# Altium PCB 简易数字示波器PCB.pcbdoc
Units mil, origin at the board's own origin, x right, y up, seen from the top; angles counter-clockwise.
Board outline 3525 x 4588.21 mil, 2 copper layers (Top Layer, Bottom Layer); 58 components, 40 nets, 190 pads, 1 vias.
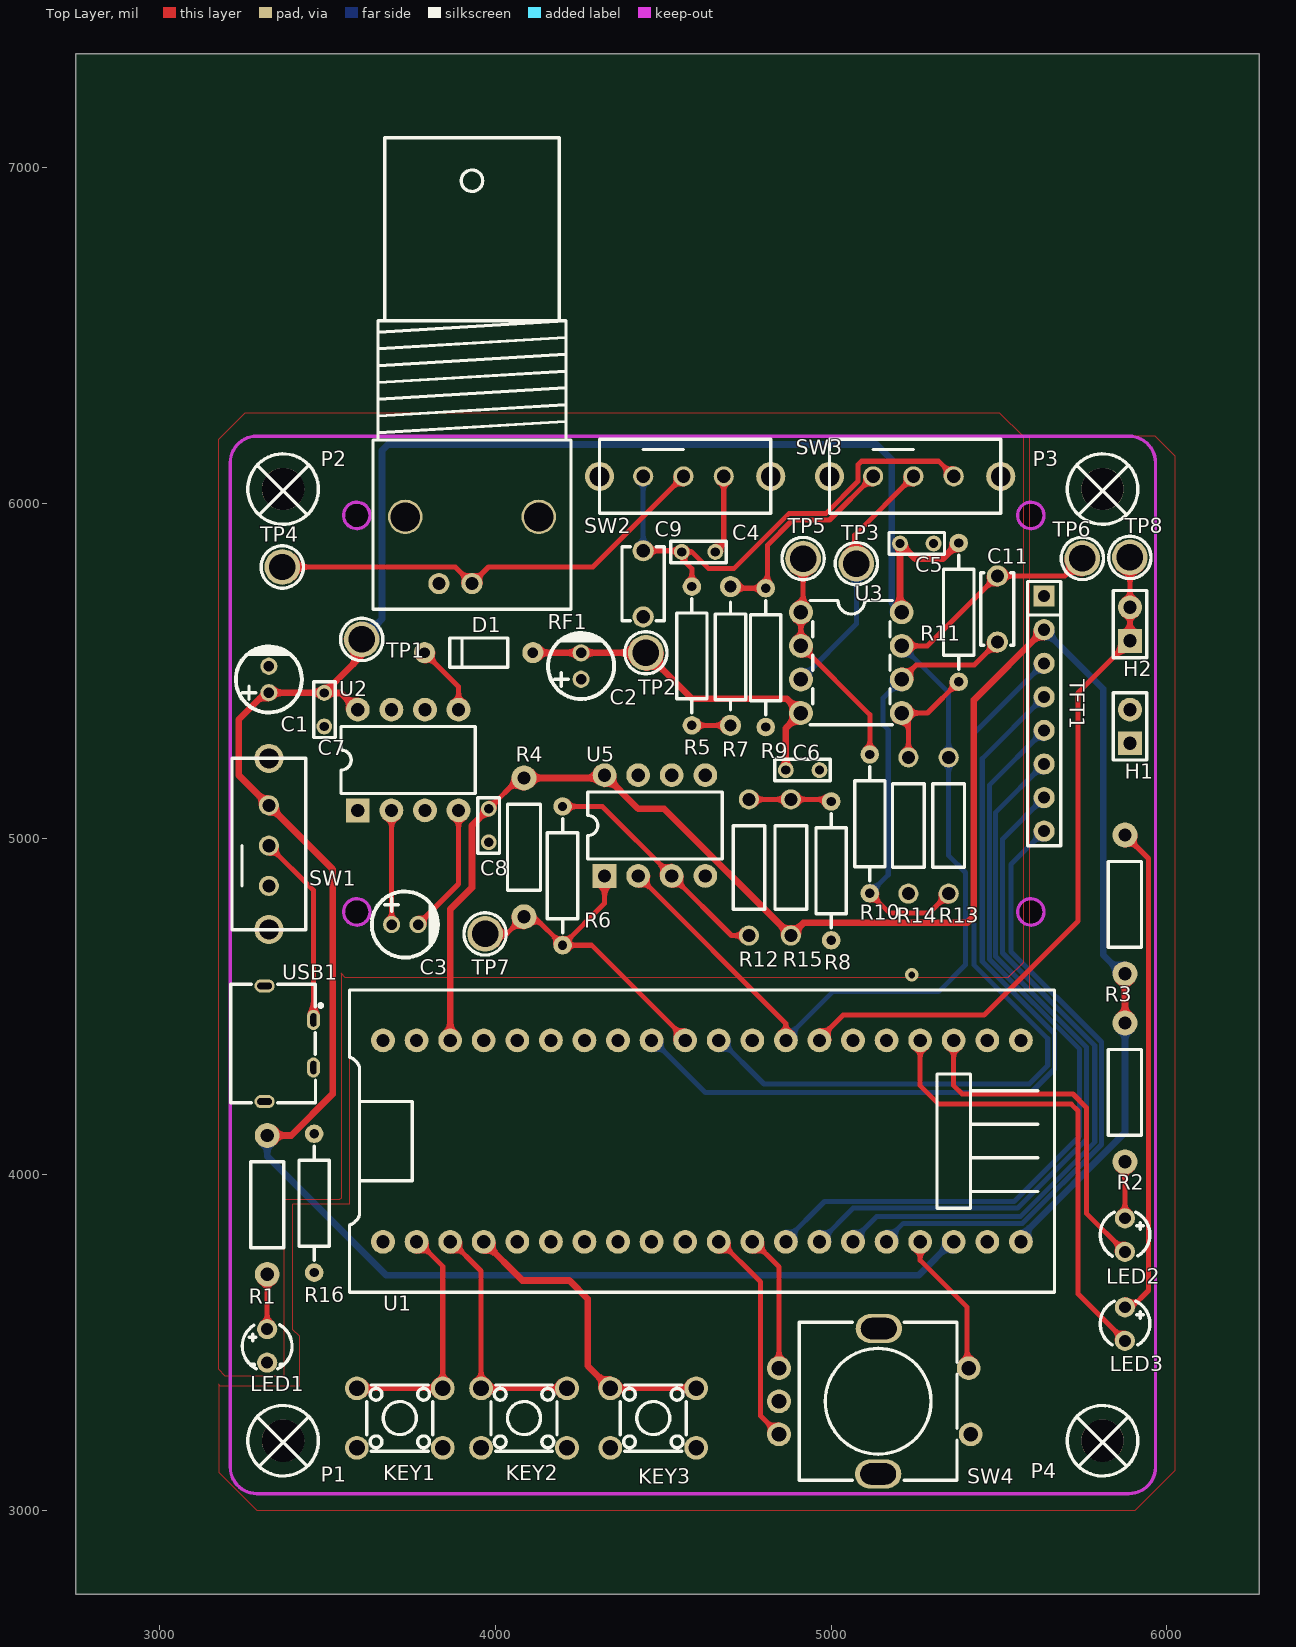
[diagram p0: Top Layer view]
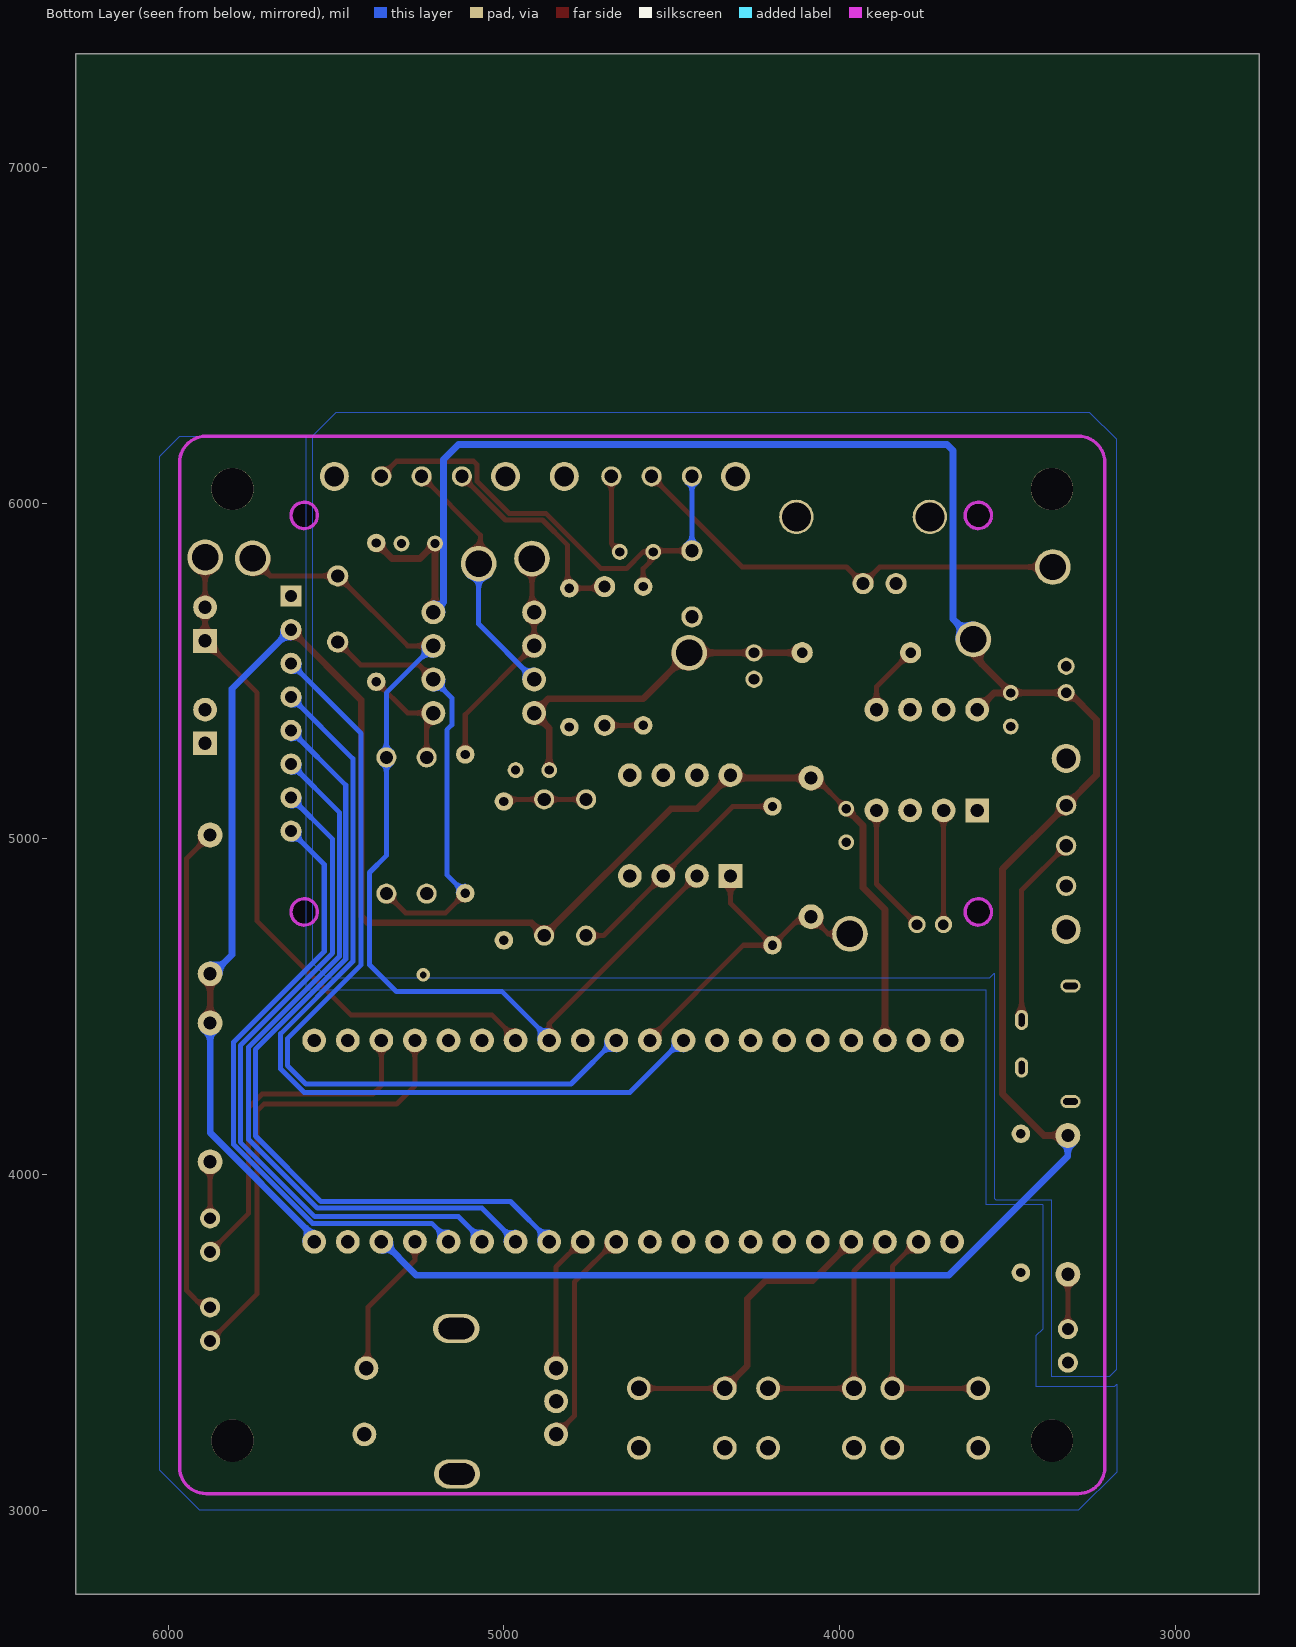
[diagram p1: Bottom Layer view, seen from below]

## Layer stack, top to bottom
Top Layer: signal copper (thickness not stored)
Dielectric: dielectric 12.6, FR-4, Dk 4.8
Bottom Layer: signal copper (thickness not stored)

## Board outline
6275,2750 2750,2750 2750,7338.21 6275,7338.21

## Design rules (kind name [scope] priority, off if disabled: settings)
Clearance copperThickness1oz [All] p1: gap=7 ignorepadtopadclearanceinfootprint=FALSE except(4: Track-Track; 6: Track-SMDPad SMDPad-SMDPad Track-THPad SMDPad-THPad THPad-THPad Track-Via SMDPad-Via THPad-Via Via-Via Track-Fill SMDPad-Fill THPad-Fill Via-Fill Fill-Fill SMDPad-Region THPad-Region Via-Region Fill-Region Region-Region Track-Poly SMDPad-Poly THPad-Poly Via-Poly Fill-Poly Poly-Poly Track-Text SMDPad-Text THPad-Text Via-Text Fill-Text Region-Text Poly-Text Text-Text Track-Hole SMDPad-Hole THPad-Hole Via-Hole Fill-Hole Region-Hole Poly-Hole Text-Hole; 11.8: Track-Region Region-Poly Track-Sheet SMDPad-Sheet THPad-Sheet Via-Sheet Fill-Sheet Region-Sheet Poly-Sheet Text-Sheet Sheet-Hole)
Clearance copperThickness2oz [All] p1: gap=7 ignorepadtopadclearanceinfootprint=FALSE except(6: Track-SMDPad SMDPad-SMDPad Track-THPad SMDPad-THPad THPad-THPad Track-Via SMDPad-Via THPad-Via Via-Via Track-Fill SMDPad-Fill THPad-Fill Via-Fill Fill-Fill SMDPad-Region THPad-Region Via-Region Fill-Region Region-Region Track-Poly SMDPad-Poly THPad-Poly Via-Poly Fill-Poly Poly-Poly Track-Text SMDPad-Text THPad-Text Via-Text Fill-Text Region-Text Poly-Text Text-Text Track-Hole SMDPad-Hole THPad-Hole Via-Hole Fill-Hole Region-Hole Poly-Hole Text-Hole; 8: Track-Track; 11.8: Track-Region Region-Poly Track-Sheet SMDPad-Sheet THPad-Sheet Via-Sheet Fill-Sheet Region-Sheet Poly-Sheet Text-Sheet Sheet-Hole)
DiffPairsRouting differentialPair [All] p1: maxuncoupledlength=10 maxlimit=6 mostfreqgap=6 toplayer_minwidth=5 toplayer_prefwidth=10 toplayer_maxwidth=100 bottomlayer_minwidth=5 bottomlayer_prefwidth=10 bottomlayer_maxwidth=100
PasteMaskExpansion pasteMaskExpansion [All] p1:
PlaneConnect innerPlane [All] p1: planeconnectstyle=Relief reliefexpansion=20 reliefentries=4 reliefconductorwidth=10 reliefairgap=10
PolygonConnect copperRegion [All] p1: connectstyle=Relief reliefentries=4 reliefconductorwidth=10 polygonreliefangle="90 Angle" airgapwidth=10
RoutingVias viaSize [All] p1: viastyle="Through Hole" holewidth=12.0078 minholewidth=11.811 maxholewidth=248.0314 width=24.0158 minwidth=19.685 maxwidth=393.7008
SolderMaskExpansion solderMaskExpansion [All] p1: useseparateexpansions=TRUE expansion=2 expansionbottom=2
Width copperThickness1oz [All] p1: maxlimit=100 minlimit=5 preferedwidth=10
Width copperThickness2oz [All] p1: maxlimit=100 minlimit=8 preferedwidth=10

## Components (designator, comment, footprint, x,y, rotation, side; value= is the part's Value field where it differs from the comment)
C1 "01EC1809SHC10UF50V" CAP-TH_BD5.0-P2.00-D0.8-FD 3325,5474.62 r90 top
C2 "01EC1809SHC10UF50V" CAP-TH_BD5.0-P2.00-D0.8-FD 4255,5514.62 r90 top
C3 "01EC1809SHC10UF50V" CAP-TH_BD5.0-P2.00-D0.8-FD 3730,4744.62 r0 top
C4 "CT4-0805B104K500F1" CAP-TH_L4.2-W3.8-P2.54-D0.5 4605,5854.62 r180 top
C5 "CT4-0805B104K500F1" CAP-TH_L4.2-W3.8-P2.54-D0.5 5255,5879.62 r0 top
C6 "CT4-0805B104K500F1" CAP-TH_L4.2-W3.8-P2.54-D0.5 4915,5204.62 r0 top
C7 "CT4-0805B104K500F1" CAP-TH_L4.2-W3.8-P2.54-D0.5 3490,5384.62 r270 top
C8 "CT4-0805B104K500F1" CAP-TH_L4.2-W3.8-P2.54-D0.5 3980,5039.62 r90 top
C9 "CC3A681KC1GEB45F30MF" CAP-TH_L5.5-W3.2-P5.00-D1.0 4440,5759.62 r90 top
C11 "N06A1B100KN0B0S0N0" CAP-TH_L5.5-W2.5-P5.00-D1.0 5495,5684.62 r90 top
D1 "1N4148_C402212" DO-35_BD2.0-L4.2-P8.20-D0.5-RD 3950,5554.62 r0 top
H1 "B-2100S02P-A110" HDR-TH_2P-P2.54-V-M-1 5890,5334.62 r90 top
H2 "B-2100S02P-A110" HDR-TH_2P-P2.54-V-M-1 5890,5639.62 r90 top
KEY1 "TC-6610-9-260G" SW-TH_4P-L5.0-W5.0-P4.50-LS6.5 3715,3274.62 r0 top
KEY2 "TC-6610-9-260G" SW-TH_4P-L5.0-W5.0-P4.50-LS6.5 4085,3274.62 r0 top
KEY3 "TC-6610-9-260G" SW-TH_4P-L5.0-W5.0-P4.50-LS6.5 4470,3274.62 r0 top
LED1 "XL-302SURD" LED-TH_BD3.8-P2.54-RD 3320,3489.62 r90 top
LED2 "XL-304UGD" LED-TH_BD3.8-P2.54-FD_GREEN 5875,3819.62 r270 top
LED3 "XL-304UGD" LED-TH_BD3.8-P2.54-FD_GREEN 5875,3554.62 r270 top
P1 "M3螺丝" M3螺丝 3369.98,3204.6 r0 top
P2 "M3螺丝" M3螺丝 3369.98,6039.25 r0 top
P3 "M3螺丝" M3螺丝 5810.93,6039.25 r0 top
P4 "M3螺丝" M3螺丝 5810.93,3204.6 r0 top
R1 "MFR0W4F1001A50" RES-TH_BD2.5-L6.5-P10.50-D0.6 3320,3909.62 r90 top
R2 "MFR0W4F1001A50" RES-TH_BD2.5-L6.5-P10.50-D0.6 5875,4244.62 r90 top
R3 "MFR0W4F1001A50" RES-TH_BD2.5-L6.5-P10.50-D0.6 5875,4804.62 r270 top
R4 "MFR0W4F1001A50" RES-TH_BD2.5-L6.5-P10.50-D0.6 4085,4974.62 r90 top
R5 "MF1/4W-510KΩ±1% T" RES-TH_BD2.3-L6.5-P10.50-D0.5 4585,5544.62 r90 top
R6 "MF1/4W-510KΩ±1% T" RES-TH_BD2.3-L6.5-P10.50-D0.5 4200,4889.62 r90 top
R7 "MFR0W4F4703A50" RES-TH_BD2.2-L6.5-P10.50-D0.6 4700,5544.62 r270 top
R8 "MF1/4W-20KΩ±1% T" RES-TH_BD2.3-L6.5-P10.50-D0.5 5000,4904.62 r90 top
R9 "MF1/4W-20KΩ±1% T" RES-TH_BD2.3-L6.5-P10.50-D0.5 4805,5539.62 r90 top
R10 "MF1/4W-20KΩ±1% T" RES-TH_BD2.3-L6.5-P10.50-D0.5 5115,5044.62 r270 top
R11 "MF1/4W-20KΩ±1% T" RES-TH_BD2.3-L6.5-P10.50-D0.5 5380,5674.62 r90 top
R12 "RN1/4W10KFT/BA1" RES-TH_BD2.4-L6.3-P10.30-D0.6 4755,4914.62 r270 top
R13 "RN1/4W10KFT/BA1" RES-TH_BD2.4-L6.3-P10.30-D0.6 5350,5039.62 r90 top
R14 "RN1/4W10KFT/BA1" RES-TH_BD2.4-L6.3-P10.30-D0.6 5230,5039.62 r90 top
R15 "RN1/4W10KFT/BA1" RES-TH_BD2.4-L6.3-P10.30-D0.6 4880,4914.62 r270 top
R16 "MF1/4W-20KΩ±1% T" RES-TH_BD2.3-L6.5-P10.50-D0.5 3460,3914.62 r90 top
RF1 "KH-BNC50-3511" ANT-TH_KH-BNC50-3511 3930,5859.62 r180 top
SW1 "SK-12E12-G5" SW-TH_SK-12E12-G5 3325,4984.62 r180 top
SW2 "SK-12E12-G5" SW-TH_SK-12E12-G5 4565,6079.62 r90 top
SW3 "SK-12E12-G5" SW-TH_SK-12E12-G5 5250,6079.62 r90 top
SW4 "EC11L1525G01" SW-TH_ALPS_EC11L1525G01 5130,3324.62 r270 top
TFT1 "1.8 TFT 128*RGB*160" LCD-TH_8P-P2.54-L56.0-W34.0_1.8-TFT 5634.06,5372.77 r270 top
TP1 "TP-黄色测试点" TESTPOINT-TH_BD3.2 3601.68,5593.89 r0 top
TP2 "TP-黄色测试点" TESTPOINT-TH_BD3.2 4447.98,5554.07 r0 top
TP3 "TP-黄色测试点" TESTPOINT-TH_BD3.2 5075,5819.62 r0 top
TP4 "TP-黄色测试点" TESTPOINT-TH_BD3.2 3365,5809.62 r0 top
TP5 "TP-黄色测试点" TESTPOINT-TH_BD3.2 4916.3,5834.74 r0 top
TP6 "TP-黄色测试点" TESTPOINT-TH_BD3.2 5748.13,5835.29 r0 top
TP7 "TP-黄色测试点" TESTPOINT-TH_BD3.2 3969.12,4716.81 r0 top
TP8 "TP-黄色测试点" TESTPOINT-TH_BD3.2 5889.69,5838.13 r0 top
U1 "LC-GD32E230C8T6" DIP-40_L53.3-W22.9-P2.54-LS15.24 4615,4099.62 r90 top
U2 "XD7660" DIP-8_L9.7-W6.4-P2.54-LS7.6-BL 3740,5234.62 r0 top
U3 "TL072IP" PDIP-8_L9.3-W6.4-P2.54-LS7.6-BL 5060,5524.62 r270 top
U5 "LM393N" DIP-8_L9.7-W6.4-P2.54-LS7.6-BL 4475,5039.62 r0 top
USB1 "KH-TYPE-C-2P" USB-SMD_KH-TYPE-C-2P 3385,4389.62 r270 top

## Footprints (in the part's own frame and the unit in brackets; to place one, negate y for a bottom-side part, rotate by r counter-clockwise, add the part's x,y. Pads: shape width x height; smd on the part's side, far side on the other; paste and mask are expansions set on the pad)
ANT-TH_KH-BNC50-3511 [mm]
  round 1.6 hole 1: 1(0,2.525) 2(2.5,2.525)
  round 2.601 hole 2.2: 3(5.05,-2.525) 4(-5.05,-2.525)
  silkscreen extent -7.49,-31.21 7.49,4.46
CAP-TH_BD5.0-P2.00-D0.8-FD [mm]
  round 1.3 hole 0.8: 1(-1,0) 2(1,0)
  silkscreen extent -2.5,-2.5 2.5,2.5
CAP-TH_L4.2-W3.8-P2.54-D0.5 [mm]
  round 1.2 hole 0.7: 1(-1.27,0) 2(1.27,0)
  silkscreen extent -2.1,-0.81 2.1,0.83
CAP-TH_L5.5-W2.5-P5.00-D1.0 [mm]
  round 1.6 hole 1: 1(-2.5,0) 2(2.5,0)
  silkscreen extent -2.75,-1.25 2.75,1.25
CAP-TH_L5.5-W3.2-P5.00-D1.0 [mm]
  round 1.6 hole 1: 1(-2.5,0) 2(2.5,0)
  silkscreen extent -2.8,-1.6 2.8,1.6
DIP-8_L9.7-W6.4-P2.54-LS7.6-BL [mm]
  rect 1.8x1.8 hole 1: 1(-3.81,-3.81)
  round 1.8 hole 1: 2(-1.27,-3.81) 3(1.27,-3.81) 4(3.81,-3.81) 5(3.81,3.81) 6(1.27,3.81) 7(-1.27,3.81) 8(-3.81,3.81)
  silkscreen extent -5.08,-2.53 5.08,2.53
DIP-40_L53.3-W22.9-P2.54-LS15.24 [mm]
  round 1.8 hole 1: 1(-7.62,24.13) 2(-7.62,21.59) 3(-7.62,19.05) 4(-7.62,16.51) 5(-7.62,13.97) 6(-7.62,11.43) 7(-7.62,8.89) 8(-7.62,6.35) 9(-7.62,3.81) 10(-7.62,1.27) 11(-7.62,-1.27) 12(-7.62,-3.81) 13(-7.62,-6.35) 14(-7.62,-8.89) 15(-7.62,-11.43) 16(-7.62,-13.97) 17(-7.62,-16.51) 18(-7.62,-19.05) 19(-7.62,-21.59) 20(-7.62,-24.13) 21(7.62,-24.13) 22(7.62,-21.59) 23(7.62,-19.05) 24(7.62,-16.51) 25(7.62,-13.97) 26(7.62,-11.43) 27(7.62,-8.89) 28(7.62,-6.35) 29(7.62,-3.81) 30(7.62,-1.27) 31(7.62,1.27) 32(7.62,3.81) 33(7.62,6.35) 34(7.62,8.89) 35(7.62,11.43) 36(7.62,13.97) 37(7.62,16.51) 38(7.62,19.05) 39(7.62,21.59) 40(7.62,24.13)
  silkscreen extent -11.43,-26.67 11.43,26.67
DO-35_BD2.0-L4.2-P8.20-D0.5-RD [mm]
  round 1.6 hole 0.8: 1(-4.1,0) 2(4.1,0)
  silkscreen extent -2.2,-1.1 2.2,1.1
HDR-TH_2P-P2.54-V-M-1 [mm]
  rect 1.8x1.8 hole 1: 1(-1.27,0)
  round 1.8 hole 1: 2(1.27,0)
  silkscreen extent -2.54,-1.27 2.54,1.27
LCD-TH_8P-P2.54-L56.0-W34.0_1.8-TFT [mm]
  rect 1.6x1.6 hole 0.914: 1(-8.89,0)
  round 1.6 hole 0.914: 2(-6.35,0) 3(-3.81,0) 4(-1.27,0) 5(1.27,0) 6(3.81,0) 7(6.35,0) 8(8.89,0)
  Multi-Layer board cut-out: 15,0 14.502,-0.135 14.138,-0.501 14.004,-1 14.138,-1.499 14.502,-1.864 15,-2 15,-2 15.498,-1.865 15.862,-1.499 15.995,-1 15.862,-0.501 15.498,-0.135 15,0
  Multi-Layer board cut-out: -15,0 -15.498,-0.135 -15.862,-0.501 -15.996,-1 -15.862,-1.499 -15.498,-1.864 -15,-2 -15,-2 -14.502,-1.865 -14.138,-1.499 -14.005,-1 -14.138,-0.501 -14.502,-0.135 -15,0
  Multi-Layer board cut-out: 15,-51 14.502,-51.135 14.138,-51.501 14.004,-52 14.138,-52.499 14.502,-52.864 15,-53 15,-53 15.498,-52.864 15.862,-52.499 15.995,-52 15.862,-51.501 15.498,-51.135 15,-51
  Multi-Layer board cut-out: -15,-51 -15.498,-51.135 -15.862,-51.501 -15.996,-52 -15.862,-52.499 -15.498,-52.864 -15,-53 -15,-53 -14.502,-52.864 -14.138,-52.499 -14.005,-52 -14.138,-51.501 -14.502,-51.135 -15,-51
  Multi-Layer keep-out circle w0.254: c15,-1 r1
  Multi-Layer keep-out circle w0.254: c-15,-1 r1
  Multi-Layer keep-out circle w0.254: c15,-52 r1
  Multi-Layer keep-out circle w0.254: c-15,-52 r1
  silkscreen extent -10,-1.25 10,1.25
LED-TH_BD3.8-P2.54-FD_GREEN [mil]
  round 60 hole 35.43: 1(-50,0) 2(50,0)
  silkscreen extent -68,-74 63,74
LED-TH_BD3.8-P2.54-RD [mil]
  round 60 hole 35.43: 1(-50,0) 2(50,0)
  silkscreen extent -68,-74 63,74
M3螺丝 [mil]
  round 126 hole 126: 1(-2.5,2.5)
  silkscreen extent -107,-102 102,107
PDIP-8_L9.3-W6.4-P2.54-LS7.6-BL [mm]
  round 1.8 hole 1.1: 1(-3.81,-3.81) 2(-1.27,-3.81) 3(1.27,-3.81) 4(3.81,-3.81) 5(3.81,3.81) 6(1.27,3.81) 7(-1.27,3.81) 8(-3.81,3.81)
  silkscreen extent -4.7,-3.11 4.7,3.11
RES-TH_BD2.2-L6.5-P10.50-D0.6 [mm]
  round 1.6 hole 0.914: 1(-5.25,0) 2(5.25,0)
  silkscreen extent -4.06,-1.14 4.06,1.14
RES-TH_BD2.3-L6.5-P10.50-D0.5 [mm]
  round 1.4 hole 0.7: 1(-5.25,0) 2(5.25,0)
  silkscreen extent -4.32,-1.15 4.32,1.15
RES-TH_BD2.4-L6.3-P10.30-D0.6 [mil]
  round 60 hole 39.37: 1(-202.76,0) 2(202.76,0)
  silkscreen extent -124,-47 124,47
RES-TH_BD2.5-L6.5-P10.50-D0.6 [mil]
  round 74 hole 39.37: 1(-206.69,0) 2(206.69,0)
  silkscreen extent -128,-49 128,49
SW-TH_4P-L5.0-W5.0-P4.50-LS6.5 [mm]
  round 1.8 hole 1.2: 1(-3.25,2.25) 2(3.25,2.25) 3(-3.25,-2.25) 4(3.25,-2.25)
  silkscreen extent -2.5,-2.5 2.5,2.5
SW-TH_ALPS_EC11L1525G01 [mm]
  oval 2.2x3.5 hole 1.6 slot 2.7 at 90 deg: 6(-5.5,0.3) 7(5.5,0.25)
  round 1.8 hole 1.1: A(-2.5,-7.25) B(2.5,-7.25) C(0,-7.25) D(-2.5,7.1) E(2.5,7.25)
  silkscreen extent -5.97,-5.72 5.97,6.22
SW-TH_SK-12E12-G5 [mil]
  round 60 hole 39.37: 1(0,125) 2(0,5) 3(0,-115)
  round 86.61 hole 59.06: 4(0,-255) 5(0,255)
  silkscreen extent -110,-255 110,255
TESTPOINT-TH_BD3.2 [mm]
  round 2.7 hole 2: 1(0,0)
  silkscreen extent -1.6,-1.6 1.6,1.6
USB-SMD_KH-TYPE-C-2P [mm]
  oval 1.524x1 hole 0.45 slot 1 at 0 deg: 1(-1.8,1.85) 2(1.8,1.85)
  oval 1x1.524 hole 0.5 slot 1.1 at 90 deg: 3(4.375,-1.85) 4(-4.375,-1.85)
  silkscreen extent -4.5,-4.41 4.46,2.53

## Via types
v1: diameter 40, hole 20, Top Layer to Bottom Layer, 1 vias

## Nets (pads, with @x,y where several pads share a name; then routed paths per layer and width w, separated by ;. In a path a pad name is that pad's centre, name@x,y a point inside that pad or via, vN(x,y) a via of type N, cw(c..) or ccw(c..) an arc to the next point about the centre after c; other vN are vias at no path point)
3V3: C8.2 R2.2 R3.2 R4.2 R15.2 TFT1.2 U1.20 U1.38 U5.8 | length 5438
  Top Layer w15: C8.2 4071.69,5181.31 R4.2 ; R3.2@5875,4582.93 R3.2@5890,4597.93
  Top Layer w20: U1.38@3865,4404.62 3865,4789.63 3930,4854.62 3930,5039.62 C8.2 ; R4.2 4316.69,5181.31 U5.8 4425,5089.62 4502.24,5089.62 R15.2 4917.76,4749.62 5405,4749.62 5425,4769.62 5425,5413.71 TFT1.2 ; R2.2 R3.2@5875,4582.93
  Bottom Layer w20: U1.20@5565,3804.62 5565,3814.63 5875,4124.62 R2.2 ; TFT1.2 5810,5446.83 5810,4654.62 5866.69,4597.93 R3.2
$1N9965: SW1.2 USB1.1 | length 574.2
  Top Layer w15: SW1.2 3457.84,4846.79 USB1.1
$1N10075: LED1.2 R1.1 | length 148.3
  Top Layer w15: LED1.2@3320,3554.62 R1.1
$1N10224: C3.1 U2.2 | length 340.3
  Top Layer w15: U2.2 3690.63,5083.99 C3.1
$1N10228: C3.2 U2.4 | length 390
  Top Layer w15: C3.2 3890,4865.25 U2.4
$1N10295: D1.1 U2.5 | length 212
  Top Layer w15: D1.1 3890,5453.2 U2.5
$1N10789: LED2.1 R2.1 | length 168.3
  Top Layer w15: LED2.1 R2.1
$1N10804: LED3.1 R3.1 | length 1476.4
  Top Layer w15: LED3.1 5895,3604.62 5945,3654.62 5945,4941.31 R3.1
$1N23444: RF1.1 SW2.2 TP4.1 | length 1347.8
  Top Layer w15: TP4.1 3880.59,5809.62 RF1.1 3979.41,5809.62 4290,5809.62 SW2.2
$1N23450: C4.1 SW2.3 | length 235.4
  Top Layer w15: C4.1 4680,5879.62 SW2.3
$1N23460: R5.1 R7.2 | length 115
  Top Layer w15: R5.1 R7.2
$1N23487: SW3.2 TP3.1 U3.3 | length 735.8
  Top Layer w15: TP3.1@5070,5829.62 5070,5904.62 SW3.2
  Bottom Layer w15: U3.3 5075,5639.62 TP3.1
$1N23554: R7.1 R9.2 SW3.1 | length 640.3
  Top Layer w15: R7.1 4705.01,5746.31 4810,5746.31 4810,5874.62 4885,5949.62 4995,5949.62 SW3.1
$1N23875: R10.1 TP5.1 U3.1 U3.2 | length 680.9
  Top Layer w15: U3.1 U3.1@4910,5664.62 ; TP5.1 4916.3,5670.92 U3.1@4910,5664.62 ; R10.1 5115,5369.62 U3.2 U3.1@4910,5664.62
$1N23894: C11.1 R10.2 R13.1 U3.6 | length 1302.5
  Top Layer w15: R10.2 5173.31,4779.62 5292.76,4779.62 R13.1 ; U3.6 5252.93,5517.56 5426.36,5517.56 C11.1
  Bottom Layer w15: R10.2 5170,4892.93 5170,5324.62 5155,5339.62 5155,5419.62 U3.6
$1N23930: R11.1 R14.2 U3.5 | length 349.2
  Top Layer w15: R14.2 5230,5354.62 U3.5 5286.69,5374.62 R11.1
$1N25839: R8.2 R12.1 R15.1 | length 247.5
  Top Layer w15: R12.1 R15.1 4993.93,5117.38 R8.2
$1N25855: R6.2 R12.2 U5.3 | length 714.2
  Top Layer w15: R6.2 4318.31,5096.31 U5.3 4702.76,4711.86 R12.2
$1N28454: C4.2 C9.2 R5.2 SW2.1 SW3.3 | length 1469.9
  Top Layer w15: C9.2 4551.57,5858.05 C4.2 ; R5.2@4585,5746.31 4585,5804.62 4555,5834.62 C4.2 ; SW3.3 5320,6124.62 5090,6124.62 5080,6114.62 5080,6064.62 4985,5969.62 4875,5969.62 4710,5804.62 4635,5804.62 4585,5854.62 C4.2
  Bottom Layer w15: C9.2 SW2.1
+5V: C1.1 C5.1 C7.1 R1.2 R11.2 SW1.3 TP1.1 U1.18 U2.8 U3.8 | length 7408.5
  Top Layer w20: R1.2 3391.69,4116.31 3515,4239.62 3515,4909.62 SW1.3 3235,5189.62 3235,5354.62 3315.63,5435.25 C1.1 3489.37,5435.25 C7.1 ; U2.8 3540,5434.62 C7.1 ; TP1.1 3601.68,5546.3 C7.1 ; U3.8 5205,5679.62 C5.1 5250,5834.62 5333.31,5834.62 R11.2
  Bottom Layer w20: R1.2 3320,4054.62 3675,3699.62 5260,3699.62 U1.18@5365,3804.62 ; TP1.1 3662.33,5654.54 3662.33,6156.95 3680,6174.62 5135,6174.62 5180,6129.62 5180,5704.62 U3.8
-5V: C2.2 C6.1 D1.2 TP2.1 U3.4 | length 1061.8
  Top Layer w20: D1.2 4111.97,5554.07 4255,5554.07 TP2.1 4584.5,5417.56 4867.07,5417.56 U3.4 4865,5329.62 C6.1
ADC: C11.2 R13.2 TP6.1 U1.28 U3.7 U5.2 | length 2968.2
  Top Layer w15: U5.2 4865,4449.62 U1.28@4865,4404.62 ; U3.7 5286.57,5574.62 C11.2 5695.89,5783.05 TP6.1
  Bottom Layer w15: U1.28@4865,4404.62 5005,4544.62 5320,4544.62 5400,4624.62 5400,4899.62 5350,4949.62 R13.2 5350,5434.62 U3.7
AGND: C1.2 C2.1 C5.2 C6.2 C7.2 C8.1 C9.1 LED1.1 R8.1 R9.1 R14.1 R16.2 RF1.2 RF1.3 RF1.4 SW1.4 SW1.5 SW2.4 SW2.5 SW3.4 SW3.5 U2.3 U5.4 U5.5 U5.6 USB1.2 USB1.3 USB1.4
BLK-PB8: TFT1.8 U1.16 | length 1844.1
  Bottom Layer w15: U1.16@5165,3804.62 5215,3854.62 5570,3854.62 5805,4089.62 5805,4394.62 5535,4664.62 5535,4923.71 TFT1.8
CS-PB7: TFT1.7 U1.15 | length 2032.4
  Bottom Layer w15: U1.15@5065,3804.62 5135,3874.62 5563.11,3874.62 5785,4096.52 5785,4384.62 5510,4659.62 5510,4998.71 TFT1.7
DC-PB6: TFT1.6 U1.14 | length 2208.9
  Bottom Layer w15: U1.14@4965,3804.62 4970,3804.62 5065,3899.62 5555,3899.62 5760,4104.62 5760,4379.62 5490,4649.62 5490,5078.71 TFT1.6
FREQ: R4.1 R6.1 TP7.1 U1.31 U5.1 | length 1026
  Top Layer w15: TP7.1 4033.87,4716.81 R4.1 4115,4767.93 R6.1 ; U5.1 4325,4807.93 R6.1 ; U1.31@4565,4404.62 4286.69,4682.93 R6.1
GND: H1.1 H1.2 KEY1.3 KEY1.4 KEY2.3 KEY2.4 KEY3.3 KEY3.4 R16.1 SW4.6 SW4.7 SW4.C SW4.E TFT1.1 U1.19 U1.39 U1.40
KEY-PB13: KEY1.1 KEY1.2 U1.2 | length 729.6
  Top Layer w15: KEY1.1@3587.05,3363.2 3842.95,3363.2 3842.95,3726.68 U1.2@3765,3804.62
KEY-PB14: KEY2.1 KEY2.2 U1.3 | length 735.4
  Top Layer w15: U1.3@3865,3804.62 3957.05,3712.58 3957.05,3363.2 KEY2.2@4212.95,3363.2
KEY-PB15: KEY3.1 KEY3.2 U1.4 | length 940.5
  Top Layer w15: U1.4@3965,3794.62 U1.4 U1.4@3965,3804.62 ; KEY3.1@4342.05,3363.2 KEY3.2@4597.95,3363.2
  Top Layer w20: U1.4 4080,3684.62 4220,3684.62 4275,3629.62 4275,3430.25 KEY3.1@4342.05,3363.2
KEYA-PB4: SW4.A U1.12 | length 414.5
  Top Layer w15: U1.12@4765,3804.62 4844.56,3725.06 SW4.A
KEYB-PB3: SW4.B U1.11 | length 652.8
  Top Layer w15: U1.11@4665,3804.62 4790,3679.63 4790,3280.76 SW4.B
KEYD-PB9: SW4.D U1.17 | length 441.4
  Top Layer w15: U1.17@5265,3804.62 5265,3744.62 5405,3604.62 5405,3427.57 SW4.D
LED1-PC14: LED2.2 U1.23 | length 1039.6
  Top Layer w15: U1.23@5365,4404.62 5365,4264.62 5390,4239.62 5720,4239.62 5760,4199.62 5760,3884.62 LED2.2
LED2-PC15: LED3.2 U1.24 | length 1384.1
  Top Layer w15: U1.24@5265,4404.62 5265,4264.62 5320,4209.62 5715,4209.62 5735,4189.62 5735,3644.62 LED3.2
PWM: 
RES-PB5: TFT1.5 U1.13 | length 2390.5
  Bottom Layer w15: U1.13@4865,3804.62 4980,3919.62 5545,3919.62 5740,4114.62 5740,4372.73 5470.98,4641.75 5470.98,5159.69 TFT1.5
SCL-PA5: TFT1.3 U1.30 | length 2434.6
  Bottom Layer w15: U1.30@4665,4404.62 4800,4269.62 5590,4269.62 5645,4324.62 5645,4404.62 5425,4624.62 5425,5313.71 TFT1.3
SDA-PA7: TFT1.4 U1.32 | length 2568.7
  Bottom Layer w15: U1.32@4465,4404.62 4625,4244.62 5595,4244.62 5665,4314.62 5665,4419.62 5450,4634.62 5450,5238.71 TFT1.4
pads on no net: H2.1 H2.2 P1.1 P2.1 P3.1 P4.1 SW1.1 TP8.1 U1.1 U1.5 U1.6 U1.7 U1.8 U1.9 U1.10 U1.21 U1.22 U1.25 U1.26 U1.27 U1.29 U1.33 U1.34 U1.35 U1.36 U1.37 U2.1 U2.6 U2.7 U5.7
copper on no net: | length 2062.8
  Top Layer w15: 4965,4404.62 5035,4474.62 5455,4474.62 5735,4754.62 5735,5434.62 5890,5589.62 5890,5689.62 5890,5837.81 5889.69,5838.13
  other v1: 5240,4594.62

## Polygon pours and split planes (outlines as drawn)
GND on Top Layer (solid, remove dead copper): 5590.13,4550.18 5589.79,4549.84 3565,4549.84 3565,3910.9 3396.28,3910.9 3395,3909.62 3395,3539.62 3415,3519.62 3415,3369.62 3180,3369.62 3175,3374.62 3175,3113.74 3288.74,3000 5905.38,3000 6025,3119.62 6025,6139.62 5965,6199.62 5590.13,6199.62
GND on Bottom Layer (solid, remove dead copper, pour order 6): 5590.13,4550.18 5589.79,4549.84 3565,4549.84 3565,3910.9 3396.28,3910.9 3395,3909.62 3395,3539.62 3415,3519.62 3415,3369.62 3180,3369.62 3175,3374.62 3175,3113.74 3288.74,3000 5905.38,3000 6025,3119.62 6025,6139.62 5965,6199.62 5590.13,6199.62
AGND on Top Layer (solid, remove dead copper, pour order 4): 5571.39,6199.23 5571.39,4631.51 5526.31,4586.42 3553.2,4586.42 3540,4599.62 3540,3929.62 3535,3924.62 3369.21,3924.62 3369.21,3399.62 3195,3399.62 3175,3419.62 3175,6189.62 3255,6269.62 5501,6269.62
AGND on Bottom Layer (solid, remove dead copper, pour order 10): 5571.39,6199.23 5571.39,4631.51 5526.31,4586.42 3553.2,4586.42 3540,4599.62 3540,3929.62 3535,3924.62 3369.21,3924.62 3369.21,3399.62 3195,3399.62 3175,3419.62 3175,6189.62 3255,6269.62 5501,6269.62

## Keep-outs
Board Outline Layer:
  lines w10: 3210,3128.36 ccw(c3288.74,3128.36) 3288.74,3049.62 5887.17,3049.62 ccw(c5887.17,3128.36) 5965.91,3128.36 5965.91,6120.49 ccw(c5887.17,6120.49) 5887.17,6199.23 3288.74,6199.23 ccw(c3288.74,6120.49) 3210,6120.49 3210,3128.36

## Other copper
Top Layer:
  drawing of 133 lines, arcs and shapes, not listed
Bottom Layer:
  region net RES-PB5: 4901.92,3830.93 4891.31,3841.54 4890.14,3840.44 4888.97,3839.47 4887.79,3838.63 4886.6,3837.91 4885.4,3837.3 4884.19,3836.78 4882.96,3836.35 4881.72,3836.01 4880.47,3835.74 4878.76,3835.47 4876.57,3835.27 4872.92,3835.16 4864.41,3835.07 4862.78,3834.99 4900.37,3797.4 4900.4,3799.12 4900.27,3802.08 4899.16,3813.87 4898.92,3818.74 4898.93,3821.07 4899.07,3823.29 4899.37,3825.36 4899.57,3826.32 4899.83,3827.24 4900.14,3828.11 4900.49,3828.91 4900.91,3829.65 4901.38,3830.33
  region net DC-PB6: 5004.41,3828.43 4993.81,3839.04 4992.4,3837.72 4991.48,3836.95 4990.58,3836.28 4989.7,3835.69 4988.82,3835.18 4987.96,3834.75 4987.11,3834.39 4986.26,3834.09 4985.41,3833.86 4984.57,3833.68 4983.73,3833.56 4982.88,3833.48 4981.6,3833.45 4980.31,3833.5 4978.09,3833.72 4971.74,3834.64 4968.41,3834.97 4966.02,3835.06 4963.45,3835.02 4962.78,3834.99 5000.37,3797.4 5000.45,3800.01 5000.38,3802.45 5000.14,3805.29 4999.22,3811.79 4998.94,3814.05 4998.83,3815.8 4998.84,3817.08 4998.89,3817.93 4998.99,3818.77 4999.14,3819.62 4999.34,3820.46 4999.61,3821.31 4999.94,3822.16 5000.33,3823.02 5000.8,3823.88 5001.35,3824.76 5001.98,3825.65 5002.7,3826.56 5003.95,3827.96
  region net CS-PB7: 5101.92,3830.93 5091.31,3841.54 5090.14,3840.44 5088.97,3839.47 5087.79,3838.63 5086.6,3837.91 5085.4,3837.3 5084.19,3836.78 5082.96,3836.35 5081.72,3836.01 5080.47,3835.74 5078.76,3835.47 5076.57,3835.27 5072.92,3835.16 5064.41,3835.07 5062.78,3834.99 5100.37,3797.4 5100.4,3799.12 5100.27,3802.08 5099.16,3813.87 5098.92,3818.74 5098.93,3821.07 5099.07,3823.29 5099.37,3825.36 5099.57,3826.32 5099.83,3827.24 5100.14,3828.11 5100.49,3828.91 5100.91,3829.65 5101.38,3830.33
  region net BLK-PB8: 5201.92,3830.93 5191.31,3841.54 5190.14,3840.44 5188.97,3839.47 5187.79,3838.63 5186.6,3837.91 5185.4,3837.3 5184.19,3836.78 5182.96,3836.35 5181.72,3836.01 5180.47,3835.74 5178.76,3835.47 5176.57,3835.27 5172.92,3835.16 5164.41,3835.07 5162.78,3834.99 5200.37,3797.4 5200.4,3799.12 5200.27,3802.08 5199.16,3813.87 5198.92,3818.74 5198.93,3821.07 5199.07,3823.29 5199.37,3825.36 5199.57,3826.32 5199.83,3827.24 5200.14,3828.11 5200.49,3828.91 5200.91,3829.65 5201.38,3830.33
  region net +5V: 5321.32,3775.08 5335.46,3760.94 5336.94,3762.33 5337.9,3763.12 5338.83,3763.82 5339.75,3764.42 5340.64,3764.93 5341.52,3765.36 5342.39,3765.71 5343.26,3765.99 5344.11,3766.2 5344.96,3766.35 5345.81,3766.44 5346.66,3766.48 5347.51,3766.47 5348.81,3766.38 5350.57,3766.14 5356.32,3765.04 5359.58,3764.52 5361.94,3764.28 5364.48,3764.18 5366.52,3764.22 5367.22,3764.26 5329.64,3801.84 5329.06,3794.49 5328.57,3790.89 5328.06,3788.25 5327.4,3785.68 5326.85,3784.02 5326.21,3782.4 5325.47,3780.82 5324.62,3779.3 5323.65,3777.83 5322.56,3776.42
  region net 3V3: 5598.68,3834.16 5584.54,3848.31 5579.1,3843.05 5576.59,3840.92 5574.65,3839.47 5573.31,3838.58 5571.94,3837.77 5570.53,3837.04 5569.08,3836.41 5567.59,3835.88 5566.04,3835.46 5564.44,3835.16 5562.78,3834.99 5600.37,3797.4 5600.4,3798.39 5600.3,3800.51 5600.02,3802.79 5599.08,3807.72 5596.79,3818.21 5596.19,3822.04 5595.98,3824.48 5595.97,3826.8 5596.05,3827.9 5596.2,3828.95 5596.41,3829.96 5596.7,3830.92 5597.06,3831.82 5597.51,3832.67 5598.05,3833.45
  region net ADC: 4901.92,4430.93 4891.31,4441.54 4890.14,4440.44 4888.97,4439.47 4887.79,4438.63 4886.6,4437.91 4885.4,4437.3 4884.19,4436.78 4882.96,4436.35 4881.72,4436.01 4880.47,4435.74 4878.76,4435.47 4876.57,4435.27 4872.92,4435.16 4864.41,4435.07 4862.78,4434.99 4900.37,4397.4 4900.4,4399.12 4900.27,4402.08 4899.16,4413.87 4898.92,4418.74 4898.93,4421.07 4899.07,4423.29 4899.37,4425.36 4899.57,4426.32 4899.83,4427.24 4900.14,4428.1 4900.49,4428.91 4900.91,4429.65 4901.38,4430.33
  region net SCL-PA5: 4696.31,4362.71 4706.92,4373.32 4705.82,4374.49 4704.85,4375.66 4704.01,4376.84 4703.29,4378.03 4702.67,4379.23 4702.16,4380.44 4701.73,4381.66 4701.39,4382.9 4701.12,4384.16 4700.85,4385.86 4700.65,4388.05 4700.54,4391.7 4700.45,4400.21 4700.37,4401.84 4662.78,4364.26 4664.5,4364.22 4667.46,4364.35 4679.25,4365.46 4684.12,4365.71 4686.45,4365.69 4688.67,4365.55 4690.73,4365.26 4691.7,4365.05 4692.62,4364.79 4693.48,4364.49 4694.29,4364.13 4695.03,4363.72 4695.71,4363.24
  region net SDA-PA7: 4496.31,4362.71 4506.92,4373.32 4505.82,4374.49 4504.85,4375.66 4504.01,4376.84 4503.29,4378.03 4502.67,4379.23 4502.16,4380.44 4501.73,4381.66 4501.39,4382.9 4501.12,4384.16 4500.85,4385.86 4500.65,4388.05 4500.54,4391.7 4500.45,4400.21 4500.37,4401.84 4462.78,4364.26 4464.5,4364.22 4467.46,4364.35 4479.25,4365.46 4484.12,4365.71 4486.45,4365.69 4488.67,4365.55 4490.73,4365.26 4491.7,4365.05 4492.62,4364.79 4493.48,4364.49 4494.29,4364.13 4495.03,4363.72 4495.71,4363.24
  region net $1N28454: 4432.5,6038.78 4447.5,6038.78 4447.55,6040.31 4447.69,6041.72 4447.84,6042.59 4448.02,6043.42 4448.24,6044.2 4448.5,6044.94 4448.79,6045.65 4449.11,6046.32 4449.47,6046.96 4449.85,6047.58 4450.49,6048.45 4451.18,6049.28 4451.93,6050.08 4453.28,6051.37 4457.66,6055.07 4460.05,6057.23 4461.8,6059 4462.5,6059.78 4417.5,6059.78 4419.25,6057.91 4421.33,6055.96 4426.14,6051.88 4427.55,6050.6 4428.58,6049.55 4429.29,6048.73 4429.94,6047.87 4430.34,6047.27 4430.71,6046.65 4431.05,6045.99 4431.36,6045.3 4431.63,6044.58 4431.87,6043.81 4432.08,6043.01 4432.24,6042.16 4432.37,6041.26 4432.48,6039.81
  region net +5V: 3310,4065.94 3330,4065.94 3330.06,4067.76 3330.23,4069.44 3330.4,4070.49 3330.62,4071.5 3330.88,4072.45 3331.18,4073.36 3331.53,4074.23 3331.91,4075.07 3332.33,4075.87 3333.03,4077.01 3333.8,4078.1 3334.64,4079.14 3335.86,4080.48 3337.88,4082.44 3344.03,4088 3346.5,4090.47 3347.75,4091.84 3292.25,4091.84 3294.33,4089.61 3297.18,4086.86 3302.82,4081.79 3304.45,4080.15 3305.65,4078.8 3306.47,4077.74 3307.21,4076.64 3307.67,4075.87 3308.09,4075.07 3308.47,4074.23 3308.82,4073.36 3309.12,4072.45 3309.38,4071.5 3309.6,4070.49 3309.77,4069.44 3309.94,4067.76
  region net 3V3: 5865,4400.94 5885,4400.94 5885.06,4402.76 5885.23,4404.44 5885.4,4405.49 5885.62,4406.5 5885.88,4407.45 5886.18,4408.36 5886.53,4409.23 5886.91,4410.07 5887.33,4410.87 5888.03,4412.01 5888.8,4413.1 5889.64,4414.14 5890.86,4415.48 5892.88,4417.44 5899.03,4423 5901.5,4425.47 5902.75,4426.84 5847.25,4426.84 5849.33,4424.61 5852.18,4421.86 5857.82,4416.79 5859.45,4415.15 5860.65,4413.8 5861.47,4412.74 5862.21,4411.64 5862.67,4410.87 5863.09,4410.07 5863.47,4409.23 5863.82,4408.36 5864.12,4407.45 5864.38,4406.5 5864.6,4405.49 5864.77,4404.44 5864.94,4402.76
  region net 3V3: 5842.3,4636.47 5828.15,4622.33 5829.31,4621.08 5830.38,4619.72 5831.38,4618.27 5832.3,4616.74 5833.15,4615.12 5834.3,4612.59 5835.28,4609.95 5836.12,4607.24 5836.8,4604.5 5837.49,4600.86 5837.94,4597.32 5838.07,4595.62 5877.32,4634.86 5875.52,4634.9 5872.44,4634.76 5860.12,4633.6 5855.03,4633.34 5852.6,4633.35 5850.28,4633.5 5848.12,4633.81 5847.11,4634.02 5846.15,4634.29 5845.25,4634.61 5844.41,4634.98 5843.63,4635.42 5842.93,4635.91
  region net $1N23894: 5146.83,4859.16 5136.23,4869.77 5134.92,4868.57 5133.63,4867.59 5132.99,4867.17 5132.35,4866.81 5131.71,4866.49 5131.07,4866.21 5130.43,4865.97 5129.79,4865.77 5128.49,4865.47 5127.18,4865.28 5125.84,4865.2 5123.76,4865.2 5117.66,4865.5 5115.09,4865.51 5113.27,4865.44 5142.5,4836.21 5142.59,4838.9 5142.37,4844.52 5142.25,4847.4 5142.26,4848.77 5142.35,4850.11 5142.54,4851.42 5142.84,4852.72 5143.04,4853.36 5143.28,4854 5143.55,4854.64 5143.87,4855.28 5144.24,4855.92 5144.65,4856.56 5145.63,4857.85
  region net ADC: 5342.5,5201.54 5357.5,5201.54 5357.55,5203.07 5357.69,5204.48 5357.84,5205.35 5358.02,5206.18 5358.24,5206.96 5358.5,5207.7 5358.79,5208.41 5359.11,5209.08 5359.47,5209.72 5359.85,5210.34 5360.49,5211.21 5361.18,5212.04 5361.93,5212.84 5363.28,5214.13 5367.66,5217.83 5370.05,5219.99 5371.8,5221.76 5372.5,5222.54 5327.5,5222.54 5329.25,5220.67 5331.33,5218.72 5336.14,5214.64 5337.55,5213.36 5338.58,5212.31 5339.29,5211.49 5339.94,5210.63 5340.34,5210.03 5340.71,5209.41 5341.05,5208.75 5341.36,5208.06 5341.63,5207.34 5341.87,5206.57 5342.08,5205.77 5342.24,5204.92 5342.37,5204.02 5342.48,5202.57
  region net ADC: 5357.5,5283.23 5342.5,5283.23 5342.45,5281.7 5342.31,5280.29 5342.16,5279.42 5341.98,5278.59 5341.76,5277.81 5341.5,5277.06 5341.21,5276.36 5340.89,5275.69 5340.53,5275.04 5340.15,5274.43 5339.51,5273.55 5338.82,5272.72 5338.07,5271.92 5336.72,5270.64 5332.34,5266.94 5329.95,5264.78 5328.2,5263 5327.5,5262.23 5372.5,5262.23 5370.75,5264.09 5368.67,5266.05 5363.86,5270.13 5362.45,5271.4 5361.42,5272.45 5360.71,5273.27 5360.06,5274.13 5359.66,5274.73 5359.29,5275.36 5358.95,5276.02 5358.64,5276.71 5358.37,5277.43 5358.13,5278.19 5357.92,5279 5357.76,5279.85 5357.63,5280.75 5357.52,5282.19
  region net $1N28454: 4447.5,5900.93 4432.5,5900.93 4432.45,5899.29 4432.29,5897.79 4432.14,5896.86 4431.94,5895.98 4431.7,5895.15 4431.43,5894.37 4431.11,5893.63 4430.77,5892.92 4430.38,5892.26 4429.97,5891.62 4429.52,5891.01 4428.8,5890.13 4428.02,5889.3 4426.88,5888.23 4423.35,5885.32 4420.13,5882.62 4418.26,5880.88 4416.76,5879.3 4416.38,5878.88 4463.62,5878.88 4462.11,5880.5 4460.24,5882.29 4457.35,5884.76 4453.41,5887.97 4452.26,5889.03 4451.45,5889.85 4450.71,5890.71 4450.25,5891.31 4449.82,5891.93 4449.42,5892.59 4449.06,5893.27 4448.72,5893.99 4448.43,5894.75 4448.17,5895.56 4447.96,5896.41 4447.78,5897.31 4447.64,5898.27 4447.52,5899.82
  region net 3V3: 5657.31,5585.37 5671.45,5599.52 5670.19,5600.89 5669.13,5602.27 5668.25,5603.67 5667.54,5605.08 5666.97,5606.52 5666.54,5607.99 5666.21,5609.48 5665.98,5611 5665.78,5613.36 5665.64,5621 5665.49,5624.74 5632.09,5591.33 5639.34,5591.15 5643.47,5591.04 5645.82,5590.84 5647.35,5590.61 5648.84,5590.29 5650.3,5589.85 5651.74,5589.29 5653.16,5588.57 5654.56,5587.69 5655.94,5586.63
  region net SCL-PA5: 5598.44,5497.75 5609.04,5487.14 5610.24,5488.26 5611.41,5489.22 5612.18,5489.77 5612.94,5490.25 5613.69,5490.66 5614.44,5491.02 5615.18,5491.32 5615.93,5491.58 5616.67,5491.78 5617.41,5491.94 5618.16,5492.05 5619.29,5492.16 5620.43,5492.19 5621.99,5492.15 5626.55,5491.71 5630.73,5491.33 5633.29,5491.25 5635.47,5491.3 5636.03,5491.33 5602.62,5524.74 5602.55,5522.53 5602.6,5519.94 5602.91,5516.15 5603.42,5511.09 5603.48,5509.53 5603.47,5508.38 5603.39,5507.24 5603.29,5506.49 5603.16,5505.75 5602.98,5505.01 5602.75,5504.26 5602.47,5503.52 5602.14,5502.77 5601.76,5502.02 5601.31,5501.26 5600.79,5500.5 5600.21,5499.73 5599.2,5498.55
  region net SDA-PA7: 5598.44,5397.75 5609.04,5387.14 5610.24,5388.26 5611.41,5389.22 5612.18,5389.77 5612.94,5390.25 5613.69,5390.66 5614.44,5391.02 5615.18,5391.32 5615.93,5391.58 5616.67,5391.78 5617.41,5391.94 5618.16,5392.05 5619.29,5392.16 5620.43,5392.19 5621.99,5392.15 5626.55,5391.71 5630.73,5391.33 5633.29,5391.25 5635.47,5391.3 5636.03,5391.33 5602.62,5424.74 5602.55,5422.53 5602.6,5419.94 5602.91,5416.15 5603.42,5411.09 5603.48,5409.53 5603.47,5408.38 5603.39,5407.24 5603.29,5406.49 5603.16,5405.75 5602.98,5405.01 5602.75,5404.26 5602.47,5403.52 5602.14,5402.77 5601.76,5402.02 5601.31,5401.26 5600.79,5400.5 5600.21,5399.73 5599.2,5398.55
  region net RES-PB5: 5598.44,5297.75 5609.04,5287.14 5610.24,5288.26 5611.41,5289.22 5612.18,5289.77 5612.94,5290.25 5613.69,5290.66 5614.44,5291.02 5615.18,5291.32 5615.93,5291.58 5616.67,5291.78 5617.41,5291.94 5618.16,5292.05 5619.29,5292.16 5620.43,5292.19 5621.99,5292.15 5626.55,5291.71 5630.73,5291.33 5633.29,5291.25 5635.47,5291.3 5636.03,5291.33 5602.62,5324.74 5602.55,5322.53 5602.6,5319.94 5602.91,5316.15 5603.42,5311.09 5603.48,5309.53 5603.47,5308.38 5603.39,5307.24 5603.29,5306.49 5603.16,5305.75 5602.98,5305.01 5602.75,5304.26 5602.47,5303.52 5602.14,5302.77 5601.76,5302.02 5601.31,5301.26 5600.79,5300.5 5600.21,5299.73 5599.2,5298.55
  region net DC-PB6: 5598.44,5197.75 5609.04,5187.14 5610.24,5188.26 5611.41,5189.22 5612.18,5189.77 5612.94,5190.25 5613.69,5190.66 5614.44,5191.02 5615.18,5191.32 5615.93,5191.58 5616.67,5191.78 5617.41,5191.94 5618.16,5192.05 5619.29,5192.16 5620.43,5192.19 5621.99,5192.15 5626.55,5191.71 5630.73,5191.33 5633.29,5191.25 5635.47,5191.3 5636.03,5191.33 5602.62,5224.74 5602.55,5222.53 5602.6,5219.94 5602.91,5216.15 5603.42,5211.09 5603.48,5209.53 5603.47,5208.38 5603.39,5207.24 5603.29,5206.49 5603.16,5205.75 5602.98,5205.01 5602.75,5204.26 5602.47,5203.52 5602.14,5202.77 5601.76,5202.02 5601.31,5201.26 5600.79,5200.5 5600.21,5199.73 5599.2,5198.55
  region net CS-PB7: 5598.44,5097.75 5609.04,5087.14 5610.24,5088.26 5611.41,5089.22 5612.18,5089.77 5612.94,5090.25 5613.69,5090.66 5614.44,5091.02 5615.18,5091.32 5615.93,5091.58 5616.67,5091.78 5617.41,5091.94 5618.16,5092.05 5619.29,5092.16 5620.43,5092.19 5621.99,5092.15 5626.55,5091.71 5630.73,5091.33 5633.29,5091.25 5635.47,5091.3 5636.03,5091.33 5602.62,5124.74 5602.55,5122.53 5602.6,5119.94 5602.91,5116.15 5603.42,5111.09 5603.48,5109.53 5603.47,5108.38 5603.39,5107.24 5603.29,5106.49 5603.16,5105.75 5602.98,5105.01 5602.75,5104.26 5602.47,5103.52 5602.14,5102.77 5601.76,5102.02 5601.31,5101.26 5600.79,5100.5 5600.21,5099.73 5599.2,5098.55
  region net BLK-PB8: 5598.44,4997.75 5609.04,4987.14 5610.24,4988.26 5611.41,4989.22 5612.18,4989.77 5612.94,4990.25 5613.69,4990.66 5614.44,4991.02 5615.18,4991.32 5615.93,4991.58 5616.67,4991.78 5617.41,4991.94 5618.16,4992.05 5619.29,4992.16 5620.43,4992.19 5621.99,4992.15 5626.55,4991.71 5630.73,4991.33 5633.29,4991.25 5635.47,4991.3 5636.03,4991.33 5602.62,5024.74 5602.55,5022.53 5602.6,5019.94 5602.91,5016.15 5603.42,5011.09 5603.48,5009.53 5603.47,5008.38 5603.39,5007.24 5603.29,5006.49 5603.16,5005.75 5602.98,5005.01 5602.75,5004.26 5602.47,5003.52 5602.14,5002.77 5601.76,5002.02 5601.31,5001.26 5600.79,5000.5 5600.21,4999.73 5599.2,4998.55
  region net +5V: 3659.91,5637.99 3645.77,5652.13 3643.93,5650.39 3642.5,5649.17 3641.1,5648.09 3639.73,5647.16 3638.39,5646.36 3637.07,5645.69 3636.09,5645.26 3635.12,5644.89 3634.15,5644.59 3633.19,5644.33 3632.24,5644.14 3630.96,5643.95 3629.69,5643.84 3628.41,5643.81 3626.81,5643.86 3624.85,5644.04 3621.84,5644.48 3612.62,5646.16 3608.43,5646.72 3604.81,5646.99 3601.43,5647.05 3598.35,5646.94 3654.72,5590.56 3654.83,5593.64 3654.77,5597.03 3654.5,5600.65 3653.95,5604.83 3652.26,5614.05 3651.82,5617.07 3651.65,5619.02 3651.6,5620.63 3651.63,5621.91 3651.73,5623.18 3651.92,5624.45 3652.12,5625.41 3652.37,5626.37 3652.68,5627.33 3653.04,5628.31 3653.47,5629.29 3654.15,5630.61 3654.94,5631.95 3655.88,5633.32 3656.95,5634.72 3658.5,5636.51
  region net $1N23487: 5067.5,5747.26 5082.5,5747.26 5082.57,5750 5082.73,5752 5082.98,5753.84 5083.32,5755.55 5083.62,5756.73 5083.97,5757.85 5084.37,5758.9 5084.8,5759.89 5085.28,5760.82 5085.8,5761.69 5086.35,5762.51 5086.95,5763.29 5087.58,5764.03 5088.24,5764.72 5089.18,5765.6 5090.18,5766.43 5091.5,5767.41 5093.48,5768.71 5100.53,5772.84 5104.05,5775.06 5106.6,5776.86 5108.83,5778.61 5111.08,5780.58 5113.35,5782.82 5114.86,5784.47 5035.14,5784.47 5037.03,5782.42 5039.3,5780.23 5041.55,5778.3 5044.13,5776.32 5047.02,5774.35 5053.77,5770.35 5057.39,5768.16 5059.04,5767.02 5060.33,5766.02 5061.29,5765.17 5062.2,5764.26 5062.85,5763.54 5063.45,5762.78 5064.02,5761.97 5064.55,5761.11 5065.04,5760.2 5065.49,5759.24 5065.9,5758.21 5066.26,5757.11 5066.59,5755.95 5066.94,5754.28 5067.21,5752.47 5067.4,5750.51 5067.5,5747.83
  region net ADC: 5238.81,5535.21 5249.41,5545.82 5248.09,5547.23 5247.33,5548.14 5246.65,5549.04 5246.07,5549.93 5245.56,5550.8 5245.12,5551.66 5244.76,5552.52 5244.47,5553.37 5244.23,5554.21 5244.06,5555.05 5243.93,5555.9 5243.86,5556.74 5243.82,5558.02 5243.87,5559.32 5244.09,5561.54 5245.01,5567.88 5245.34,5571.21 5245.44,5573.61 5245.4,5576.17 5245.36,5576.84 5207.78,5539.26 5210.39,5539.18 5212.83,5539.24 5215.66,5539.48 5222.17,5540.41 5224.43,5540.68 5226.17,5540.79 5227.46,5540.79 5228.3,5540.73 5229.15,5540.63 5229.99,5540.48 5230.84,5540.28 5231.68,5540.02 5232.53,5539.69 5233.39,5539.29 5234.26,5538.82 5235.14,5538.27 5236.03,5537.64 5236.94,5536.93 5238.33,5535.67
  region net +5V: 5187.07,5711.69 5172.93,5697.55 5174.07,5696.34 5174.71,5695.56 5175.27,5694.81 5175.74,5694.08 5176.14,5693.36 5176.46,5692.67 5176.72,5691.98 5176.91,5691.31 5177.05,5690.64 5177.13,5689.98 5177.16,5689.33 5177.14,5688.67 5177.09,5688.01 5176.94,5687.02 5176.65,5685.66 5175.58,5681.6 5175.11,5679.5 5174.81,5677.68 5174.66,5676.21 5174.59,5674.65 5174.61,5672.98 5174.64,5672.4 5212.22,5709.99 5210.52,5710.04 5208.92,5710 5207.42,5709.87 5205.56,5709.6 5203.43,5709.15 5199.31,5708.06 5197.94,5707.74 5196.94,5707.57 5196.28,5707.5 5195.62,5707.47 5194.97,5707.48 5194.31,5707.53 5193.65,5707.64 5192.98,5707.8 5192.3,5708.02 5191.61,5708.31 5190.9,5708.67 5190.18,5709.11 5189.44,5709.62 5188.68,5710.22 5187.48,5711.29
  region net $1N23487: 4949.41,5503.43 4938.81,5514.04 4937.4,5512.71 4936.48,5511.95 4935.58,5511.28 4934.7,5510.69 4933.82,5510.18 4932.96,5509.75 4932.11,5509.39 4931.26,5509.09 4930.41,5508.86 4929.57,5508.68 4928.73,5508.56 4927.88,5508.48 4926.6,5508.45 4925.3,5508.5 4923.08,5508.72 4916.74,5509.64 4913.41,5509.97 4911.01,5510.06 4908.45,5510.02 4907.78,5509.99 4945.36,5472.4 4945.45,5475.01 4945.38,5477.45 4945.14,5480.29 4944.22,5486.79 4943.94,5489.05 4943.83,5490.8 4943.84,5492.08 4943.89,5492.93 4943.99,5493.77 4944.14,5494.62 4944.34,5495.46 4944.61,5496.31 4944.93,5497.16 4945.33,5498.01 4945.8,5498.88 4946.35,5499.76 4946.98,5500.65 4947.7,5501.56 4948.95,5502.96
  region net $1N23894: 5170.59,5445.82 5181.19,5435.21 5182.6,5436.53 5183.52,5437.3 5184.42,5437.97 5185.3,5438.56 5186.18,5439.07 5187.04,5439.5 5187.89,5439.86 5188.74,5440.16 5189.59,5440.39 5190.43,5440.57 5191.27,5440.69 5192.12,5440.77 5193.4,5440.8 5194.7,5440.75 5196.92,5440.53 5203.26,5439.61 5206.59,5439.28 5208.99,5439.18 5211.55,5439.22 5212.22,5439.26 5174.64,5476.84 5174.55,5474.23 5174.62,5471.8 5174.86,5468.96 5175.78,5462.46 5176.06,5460.2 5176.17,5458.45 5176.16,5457.17 5176.11,5456.32 5176.01,5455.47 5175.86,5454.63 5175.66,5453.79 5175.39,5452.94 5175.07,5452.09 5174.67,5451.23 5174.2,5450.36 5173.65,5449.49 5173.02,5448.59 5172.3,5447.69 5171.05,5446.29

## Text inside footprints (layer, text, board x,y; h text height)
TFT1: Mech15 "128*RGB*160" at 4685.01,5704.7 h80 r270